# Altium PCB joint_board.PcbDoc
Units mil, origin at the board's own origin, x right, y up, seen from the top; angles counter-clockwise.
Board outline 6000 x 4000 mil, 2 copper layers (Top Layer, Bottom Layer); 57 components, 53 nets, 256 pads, 1 vias.
Unrouted connection lines stored in the file: 166.
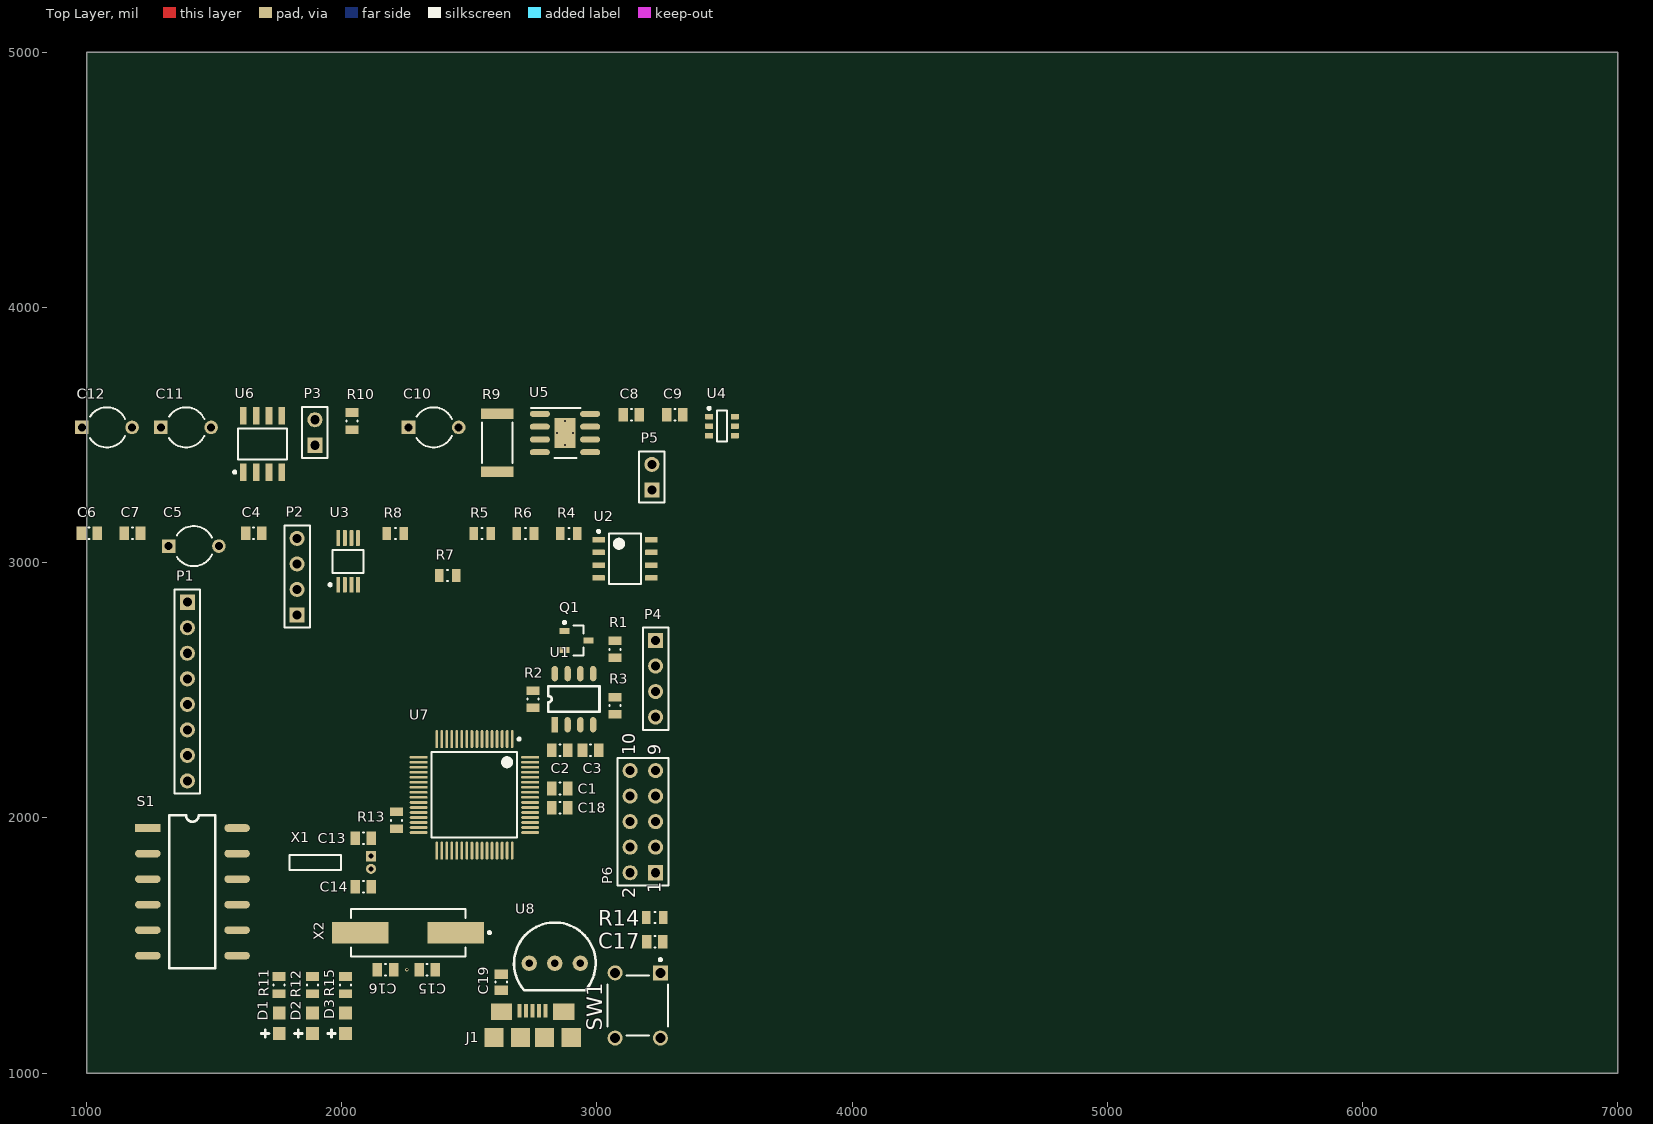
[diagram p0: Top Layer view]
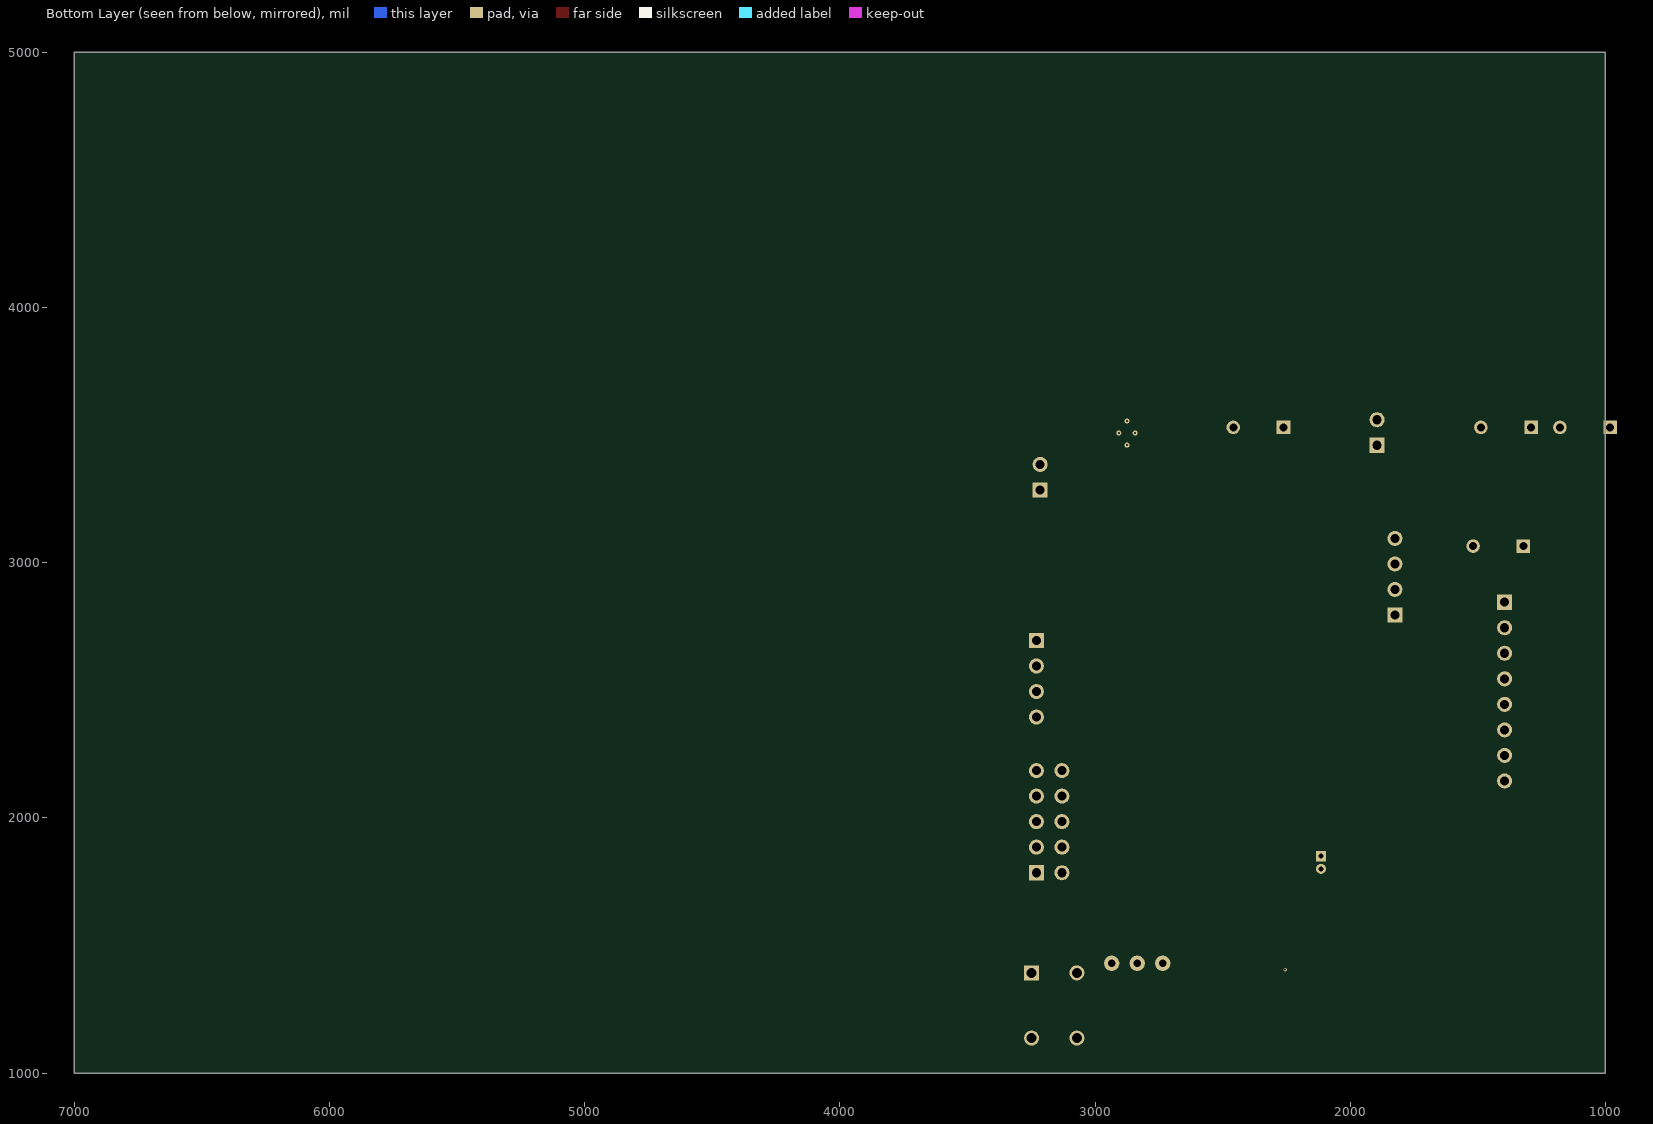
[diagram p1: Bottom Layer view, seen from below]

## Layer stack, top to bottom
Top Solder: solder mask 0.4, Solder Resist, Dk 3.5
Top Layer: signal copper 1.4
Dielectric 1: dielectric 12.6, FR-4, Dk 4.8
Bottom Layer: signal copper 1.4
Bottom Solder: solder mask 0.4, Solder Resist, Dk 3.5

## Board outline
1000,1000 7000,1000 7000,5000 1000,5000

## Design rules (kind name [scope] priority, off if disabled: settings)
Clearance [All] p1: gap=8 ignorepadtopadclearanceinfootprint=FALSE
ComponentClearance [All] p1 off: gap=10 collisioncheckmode=3 verticalgap=10 showdistances=FALSE
PolygonConnect [All] p1: connectstyle=Relief reliefconductorwidth=10 reliefentries=4 polygonreliefangle="90 Angle" airgapwidth=10
RoutingVias [All] p1: holewidth=28 width=50 viastyle="Through Hole" minholewidth=8 minwidth=15 maxholewidth=28 maxwidth=50
SolderMaskExpansion [All] p1: expansion=4
Width [All] p1: maxlimit=100 minlimit=8 preferedwidth=8
29 further rules are at their usual default settings.

## Classes and differential pairs
component class joint_board: C13 C14 C15 C16 C17 C18 C19 D1 D2 D3 J1 P4 P5 P6 R11 R12 R13 R14 R15 SW1 U7 U8 X1 X2
component class joint_board_motor_drivers: C8 C9 C10 C11 C12 P3 R9 R10 U4 U5 U6
component class joint_board_load_cell: C4 C5 C6 C7 P2 R4 R5 R6 R7 R8 U2 U3
component class joint_board_hall_effect_encoder: P1
component class joint_board_can: C1 C2 C3 Q1 R1 R2 R3 S1 U1

## Components (designator, comment, footprint, x,y, rotation, side; value= is the part's Value field where it differs from the comment)
C1 "0.1uF" CAPC0805(2012)145_L 2855,2115 r180 top
C2 "47pF" CAPC0805(2012)145_L 2855,2265 r180 top
C3 "47pF" CAPC0805(2012)145_L 2975,2265 r0 top
C4 "10nF" CAPC0805(2012)145_L 1655,3115 r0 top
C5 "1uF" CAPR5-4X5 1420,3065 r0 top
C6 "10nF" CAPC0805(2012)145_L 1010,3115 r0 top
C7 "10nF" CAPC0805(2012)145_L 1180,3115 r0 top
C8 "10nF" CAPC0805(2012)145_L 3135,3580 r0 top
C9 "10nF" CAPC0805(2012)145_L 3305,3580 r0 top
C10 "100uF" CAPR5-4X5 2360,3530 r0 top
C11 "0.1uF" CAPR5-4X5 1390,3530 r0 top
C12 "0.1uF" CAPR5-4X5 1080,3530 r0 top
C13 "24pF" CAPC0805(2012)145_L 2085,1920 r0 top
C14 "24pF" CAPC0805(2012)145_L 2085,1730 r0 top
C15 "10pF" CAPC0805(2012)145_L 2335,1405 r180 top
C16 "10pF" CAPC0805(2012)145_L 2171.5,1405 r0 top
C17 "1nF" CAPC0805(2012)145_L 3226.93,1515 r0 top
C18 "0.1uF" CAPC0805(2012)145_L 2855,2040 r180 top
C19 "0.1uF" CAPC0805(2012)145_L 2625,1356.5 r90 top
D1 "VM_LED" "0805 Diode" 1755,1195 r90 top
D2 "VCC_LED" "0805 Diode" 1885,1195 r90 top
D3 "HB_LED_LED" "0805 Diode" 2015,1195 r90 top
J1 "10118192-0001LF" 10118192-0001LF_10118192-0001LF(Primary) 2747.76,1082.91 r0 top
P1 "Header 8" HDR1X8 1395,2845 r270 top
P2 "Load Cell" HDR1X4 1825,2795 r90 top
P3 "Header 2" HDR1X2 1895,3460 r90 top
P4 "Header 4" HDR1X4 3230,2695 r270 top
P5 "Header 2" HDR1X2 3215,3285 r90 top
P6 "Header 5X2" HDR2X5 3230,1785 r90 top
Q1 "BS170" SOT23-3 2920,2695 r0 top
R1 "115" RESC0805(2012)_L 3070,2660 r270 top
R2 "1k" RESC0805(2012)_L 2750,2465 r270 top
R3 "100k" RESC0805(2012)_L 3070,2440 r90 top
R4 "5.0k" RESC0805(2012)_L 2890,3115 r0 top
R5 "1k" RESC0805(2012)_L 2550,3115 r0 top
R6 "200k" RESC0805(2012)_L 2720,3115 r0 top
R7 "10k" RESC0805(2012)_L 2415,2950 r0 top
R8 "3.9k" RESC0805(2012)_L 2210,3115 r0 top
R9 "0.1 Shunt Resistor" RESC2512(6432)_L 2610,3470 r90 top
R10 "10k" RESC0805(2012)_L 2040,3555 r90 top
R11 "4k" RESC0805(2012)_L 1755,1345 r270 top
R12 "1k" RESC0805(2012)_L 1885,1345 r270 top
R13 "10k" RESC0805(2012)_L 2215,1990 r270 top
R14 "10k" RESC0805(2012)_L 3226.93,1610 r180 top
R15 "1k" RESC0805(2012)_L 2015,1345 r270 top
S1 "DIP_Switch_6" SOP12 1240,1960 r0 top
SW1 "1825910-6" TECO-1825910-6_V 3160,1265 r270 top
U1 "TCAN332" SOP8 2835,2365 r90 top
U2 "LM358DR" D0008A_L 3110,3015 r0 top
U3 "INA332AIDGKR" DGK0008A_M 2025,3005 r90 top
U4 "SN74LVC1G18DBVR" DBV0006A_L 3490,3535 r0 top
U5 "DRV8872DDAR" DDA0008H_N 2875,3507.76 r0 top value=Value
U6 "ACS722LLCTR-05AB-T" ALEG-LC-8_V 1690,3465 r0 top
U7 "TM4C123GH6PMT7R" PM0064A_N 2520,2090 r270 top value=Value
U8 "LP2950-33LPRE3" LP3 2835,1430 r0 top value=Value
X1 "AB15T-32.768KHZ" ABRA-AB15T-2_V 2115,1825 r0 top
X2 "ABLS2-4.096MHZ-D4Y-T" ABRA-ABLS2-2_V 2260,1550 r180 top

## Footprints (in the part's own frame and the unit in brackets; to place one, negate y for a bottom-side part, rotate by r counter-clockwise, add the part's x,y. Pads: shape width x height; smd on the part's side, far side on the other; paste and mask are expansions set on the pad)
"0805 Diode" [mil]
  rect 50x50 smd: 1(-40,0) 2(40,0)
  silkscreen extent -55,40 -25,70
10118192-0001LF_10118192-0001LF(Primary) [mm]
  rect 0.4x1.35 smd: 1(-1.3,4.1) 2(-0.65,4.1) 3(0,4.1) 4(0.65,4.1) 5(1.3,4.1)
  rect 1.9x1.9 smd: M1(-1.2,1.45) M2(1.2,1.45) S1(-3.85,1.45) S2(3.85,1.45)
  rect 2.1x1.6 smd: S3(-3.1,4) S4(3.1,4)
ABRA-AB15T-2_V [mm] "THD, 2-Leads, Body 5.1x1.5mm, Height 1.5mm"
  rect 1x1 hole 0.5: 1(0,0.627)
  round 1 hole 0.5: 2(0,-0.627)
  silkscreen extent -8.1,-0.75 -3,0.75, body extent -8.1,-0.74 0.1,0.77, height 1.5
ABRA-ABLS2-2_V [mm] "SMD, 2-Leads, Body 11.4x4.7mm, Height 3.3mm"
  rect 5.6x2.1 smd: 1(-4.75,0) 2(4.75,0)
  silkscreen extent -8.23,-2.35 5.7,2.35, body extent -5.7,-2.35 5.7,2.35, height 3.3
ALEG-LC-8_V [mm] "SOIC, 8-Leads, Body 4.9x3.9mm, Pitch 1.27mm"
  rect 0.65x1.75 smd: 1(-1.905,-2.8) 2(-0.635,-2.8) 3(0.635,-2.8) 4(1.905,-2.8) 5(1.905,2.8) 6(0.635,2.8) 7(-0.635,2.8) 8(-1.905,2.8)
  silkscreen extent -2.9,-2.92 2.45,1.53, body extent -2.45,-1.95 2.45,1.95, height 1.75
CAPC0805(2012)145_L [mm]
  rect 0.95x1.35 smd: 1(-0.8,0) 2(0.8,0)
  silkscreen extent -0.05,-0.58 0.05,0.58, body extent -1.1,-0.72 1.1,0.72, height 1.45
CAPR5-4X5 [mm] "Capacitor; 2 Leads"
  rect 1.35x1.35 hole 0.8: 1(-2.5,0)
  round 1.35 hole 0.8: 2(2.5,0)
  silkscreen extent -1.69,-2 1.82,2
D0008A_L [mm] "SOIC, 8-Leads, Body 5x4mm, Pitch 1.27mm, IPC High Density"
  rrect18% 1.25x0.55 smd: 1(-2.625,1.905) 2(-2.625,0.635) 3(-2.625,-0.635) 4(-2.625,-1.905) 5(2.625,-1.905) 6(2.625,-0.635) 7(2.625,0.635) 8(2.625,1.905)
  silkscreen extent -2.75,-2.5 1.6,2.85, body extent -3,-2.45 3,2.45, height 1.63
DBV0006A_L [mm] "SOT23, 6-Leads, Body 3.05x1.75mm, Pitch 0.95mm, IPC High Density"
  rrect18% 0.8x0.55 smd: 1(-1.275,0.95) 2(-1.275,0) 3(-1.275,-0.95) 4(1.275,-0.95) 5(1.275,0) 6(1.275,0.95)
  silkscreen extent -1.4,-1.55 0.5,1.9, body extent -1.42,-1.46 1.42,1.46, height 1.11
DDA0008H_N [mm]
  oval 2x0.6 smd paste+0 mask+0.051: 1(-2.5,1.905) 2(-2.5,0.635) 3(-2.5,-0.635) 4(-2.5,-1.905) 5(2.5,-1.905) 6(2.5,-0.635) 7(2.5,0.635) 8(2.5,1.905)
  rect 2.13x3 smd paste+0 mask+0.051: 9(0,0)
  round 0.5 / inner round 1.524 / far side round 0.5 hole 0.203 mask+0.051: V(-0.815,0) V(0,-1.2) V(0,1.2) V(0.815,0)
  silkscreen extent -3.38,-2.5 1.53,2.51, body extent 0,0 0.25,0.25, height 0.25
DGK0008A_M [mm] "TSOP, 8-Leads, Body 3.1x3.1mm, Pitch 0.65mm, IPC Low Density"
  rrect22% 1.55x0.381 smd: 1(-2.325,0.975) 2(-2.325,0.325) 3(-2.325,-0.325) 4(-2.325,-0.975) 5(2.325,-0.975) 6(2.325,-0.325) 7(2.325,0.325) 8(2.325,0.975)
  silkscreen extent -2.45,-1.55 1.15,1.92, body extent -2.45,-1.5 2.45,1.5, height 0.94
HDR1X2 [mm] "Connector; Header; 2 Position"
  rect 1.5x1.5 hole 0.9: 1(0,0)
  round 1.5 hole 0.9: 2(2.54,0)
  silkscreen extent -1.27,-1.27 3.81,1.27
HDR1X4 [mm] "Connector; Header; 4 Position"
  rect 1.5x1.5 hole 0.9: 1(0,0)
  round 1.5 hole 0.9: 2(2.54,0) 3(5.08,0) 4(7.62,0)
  silkscreen extent -1.27,-1.27 8.89,1.27
HDR1X8 [mm] "Connector; Header; 8 Position"
  rect 1.5x1.5 hole 0.9: 1(0,0)
  round 1.5 hole 0.9: 2(2.54,0) 3(5.08,0) 4(7.62,0) 5(10.16,0) 6(12.7,0) 7(15.24,0) 8(17.78,0)
  silkscreen extent -1.27,-1.27 19.05,1.27
HDR2X5 [mm] "Connector; Header; 5x2 Position"
  rect 1.5x1.5 hole 0.9: 1(0,0)
  round 1.5 hole 0.9: 2(0,2.54) 3(2.54,0) 4(2.54,2.54) 5(5.08,0) 6(5.08,2.54) 7(7.62,0) 8(7.62,2.54) 9(10.16,0) 10(10.16,2.54)
  silkscreen extent -1.27,-1.27 11.43,3.81
LP3 [mil]
  round 60 hole 30: 1(100,0) 2(0,0) 3(-100,0)
  silkscreen extent -160,-105 160,160
PM0064A_N [mm]
  oval 1.8x0.267 smd paste-0.102 mask+0.051: 1(-5.55,3.75) 2(-5.55,3.25) 3(-5.55,2.75) 4(-5.55,2.25) 5(-5.55,1.75) 6(-5.55,1.25) 7(-5.55,0.75) 8(-5.55,0.25) 9(-5.55,-0.25) 10(-5.55,-0.75) 11(-5.55,-1.25) 12(-5.55,-1.75) 13(-5.55,-2.25) 14(-5.55,-2.75) 15(-5.55,-3.25) 16(-5.55,-3.75) 33(5.55,-3.75) 34(5.55,-3.25) 35(5.55,-2.75) 36(5.55,-2.25) 37(5.55,-1.75) 38(5.55,-1.25) 39(5.55,-0.75) 40(5.55,-0.25) 41(5.55,0.25) 42(5.55,0.75) 43(5.55,1.25) 44(5.55,1.75) 45(5.55,2.25) 46(5.55,2.75) 47(5.55,3.25) 48(5.55,3.75)
  oval 0.267x1.8 smd paste-0.102 mask+0.051: 17(-3.75,-5.55) 18(-3.25,-5.55) 19(-2.75,-5.55) 20(-2.25,-5.55) 21(-1.75,-5.55) 22(-1.25,-5.55) 23(-0.75,-5.55) 24(-0.25,-5.55) 25(0.25,-5.55) 26(0.75,-5.55) 27(1.25,-5.55) 28(1.75,-5.55) 29(2.25,-5.55) 30(2.75,-5.55) 31(3.25,-5.55) 32(3.75,-5.55) 49(3.75,5.55) 50(3.25,5.55) 51(2.75,5.55) 52(2.25,5.55) 53(1.75,5.55) 54(1.25,5.55) 55(0.75,5.55) 56(0.25,5.55) 57(-0.25,5.55) 58(-0.75,5.55) 59(-1.25,5.55) 60(-1.75,5.55) 61(-2.25,5.55) 62(-2.75,5.55) 63(-3.25,5.55) 64(-3.75,5.55)
  silkscreen extent -5.67,-4.25 4.25,4.58, body extent 0,0 0.25,0.25, height 0.25
RESC0805(2012)_L [mm]
  rect 0.85x1.3 smd: 1(-0.85,0) 2(0.85,0)
  silkscreen extent -0.05,-0.55 0.05,0.55, body extent -1.1,-0.67 1.1,0.68, height 0.7
RESC2512(6432)_L [mm]
  rect 1.05x3.25 smd: 1(-2.9,0) 2(2.9,0)
  silkscreen extent -2,-1.52 2,1.53, body extent -3.25,-1.7 3.25,1.7, height 0.75
SOP8 [mil]
  rect 60x25 smd: 1(0,0)
  oval 60x25 smd: 2(0,-50) 3(0,-100) 4(0,-150) 5(200,-150) 6(200,-100) 7(200,-50) 8(200,0)
  silkscreen extent 50,-175 150,25
SOP12 [mil]
  rect 100x30 smd: 1(0,0)
  oval 100x30 smd: 2(0,-100) 3(0,-200) 4(0,-300) 5(0,-400) 6(0,-500) 7(350,-500) 8(350,-400) 9(350,-300) 10(350,-200) 11(350,-100) 12(350,0)
  silkscreen extent 85,-550 265,50
SOT23-3 [mm] "SOT23, 3-Leads, Body 2.90x2.45mm, Pitch 0.95mm, IPC Medium Density"
  rect 1x0.6 smd: 1(-1.2,0.95) 2(-1.2,-0.95) 3(1.2,0)
  silkscreen extent -1.32,-1.5 0.7,1.92, body extent -0.7,-1.5 0.7,1.5, height 1.1
TECO-1825910-6_V [mm] "Switch, 4-Leads, Body 5.99x5.99mm"
  rect 1.5x1.5 hole 0.99: 1(-3.25,2.25)
  round 1.5 hole 0.99: 2(3.25,2.25) 3(-3.25,-2.25) 4(3.25,-2.25)
  silkscreen extent -4.67,-2.99 2.99,3, body extent -3,-2.99 2.99,3, height 5

## Part data
C1 C2 C3 C4 C6 C7 C8 C9 C13 C14 C15 C16 C17 C18 C19: library part CMP-1590-00003-1, "0805 (2012 Metric) Chip Capacitor", Case-EIA=0805, Case-Metric=2012, PackageReference=CAPC0805(2012)145
C5 C11 C12: library part Cap2, "Capacitor", PackageDescription="Capacitor; 2 Leads", PackageReference=CAPR5-4X5, Published=23-Sep-2002, Publisher="Altium Limited"
C10: library part Cap2, "100uF Filter Capacitor", PackageDescription="Capacitor; 2 Leads", PackageReference=CAPR5-4X5, Published=23-Sep-2002, Publisher="Altium Limited"
D1 D2 D3: library part SMD_LED
J1: "CONN USB MICRO B RECPT SMT R/A", Package=None, Availability=Good, MF=Amphenol, MP=10118192-0001LF, Price="0.22 USD"
P1: "Header, 8-Pin", LatestRevisionDate=17-Jul-2002, LatestRevisionNote="Re-released for DXP Platform.", Publisher="Altium Limited"
P2: library part "Header 4", "Header, 4-Pin", LatestRevisionDate=17-Jul-2002, LatestRevisionNote="Re-released for DXP Platform.", Publisher="Altium Limited"
P3 P5: "Header, 2-Pin", LatestRevisionDate=17-Jul-2002, LatestRevisionNote="Re-released for DXP Platform.", Publisher="Altium Limited"
P4: "Header, 4-Pin", LatestRevisionDate=17-Jul-2002, LatestRevisionNote="Re-released for DXP Platform.", Publisher="Altium Limited"
P6: "Header, 5-Pin, Dual row", LatestRevisionDate=17-Jul-2002, LatestRevisionNote="Re-released for DXP Platform.", Publisher="Altium Limited"
Q1: "Small Signal MOSFET, 500 mA, 60 V, N-Channel, 3-Pin TO-92, Bulk Box", Manufacturer="On Semiconductor", Package Type=TO-92, Supplier Part Number 1=BS170OS-ND, Channel Polarity="N Channel", ComponentLink1Description="Manufacturer URL", ComponentLink1URL=http://www.onsemi.com/, ComponentLink2Description=Datasheet, ComponentLink2URL=http://www.onsemi.com/pub_link/Collateral/BS170-D.PDF, ComponentLink3Description="Package Specification", ComponentLink3URL=http://www.onsemi.cn/pub_link/Collateral/2N6426-D.PDF, Configuration=Single, DatasheetVersion="Rev. 6", ID Max (A)=0.5, Mounting Technology="Through Hole", PackageDescription="3-Pin Transistor Outline, Body 4.825 x 3.685 mm, Pitch 1.27 mm", PackageReference=TO-92-3-29-11_AM_SL, PackageVersion="Rev. AM", Packing="Bulk Box", PartNumber=BS170, PD Max (W)=0.35, Supplier 1=Digi-Key, V(BR)DSS Min (V)=60, VGS(th) Max (V)=3, VGS Max (V)=20
R1 R2 R3 R4 R5 R6 R7 R8 R10 R11 R12 R13 R14 R15: library part CMP-1591-00002-1, "0805 (2012 Metric) Chip Resistor", Case-EIA=0805, Case-Metric=2012, PackageReference=RESC0805(2012)
R9: library part CMP-1591-00007-1, "2512 (6432 Metric) Chip Resistor", Case-EIA=2512, Case-Metric=6432, PackageReference=RESC2512(6432)
S1: "6 pin DIP switch"
SW1: library part CMP-1684-00021-1, "Tact Switch, SPST-NO, 0.05 A, -35 to 85 degC, 4-Pin THD, RoHS, Bulk", Actuator Color=Black, Contact Rating @ Voltage=0.05A@24VDC, Dielectric Strength=500VAC, Manufacturer="TE Connectivity", Maximum AC Voltage Rating=N/A, Maximum Contact Resistance=100mOhm, Maximum DC Voltage Rating=24V, Minimum Insulation Resistance=100MOhm, Operating Temperature=-35to85C, Package Description="4-Pin Through Hole Device, Body 5.99 x 5.99 mm, Pitch 6.5 mm", Package Reference=THD, Actuator Length=1.4mm, Actuator Material=PolybutyleneTerephthalate, Actuator Style=RoundButton, Base Material=N/A, Body Orientation=Straight, Bushing Type=Unthreaded, Contact Material=CopperAlloy, Contact Plating=Silver, Datasheet URL=http://www.te.com/commerce/DocumentDelivery/DDEController?Action=showdoc&DocId=Customer+Drawing%7F1825910%7FC9%7Fpdf%7FEnglish%7FENG_CD_1825910_C9.pdf%7F1825910-6, Datasheet Version="Rev. C9", Dimension=5.99x5mm, Electrical Life=100000Cycles, Family=1825910, Function=MomentaryContact, Housing Material=N/A, Illumination=N/R, Manufacturer URL=http://www.te.com, Mechanical Life=100000Cycles, Mounting=ThroughHole, Packaging=N/A, Part No=1825910-6, Pole Throw Configuration=SPST, Product Weight=N/A, RoHS=Yes, Seal Description=N/A, Seal Location=N/A, Switch Configuration=OFF(ON), Terminal Type=PCPins, Thread Size=N/R
U1: "3.3V CAN Transceiver"
U2: library part CMP-1685-00009-1, "Dual Operational Amplifier, 3 to 32 V, 0 to 70 degC, 8-Pin SOIC (D), Green (RoHS & no Sb/Br), Tape and Reel", Code_JEDEC=MS-012, ComponentLink1Description="Manufacturer URL", ComponentLink1URL=http://www.ti.com/, ComponentLink2Description=Datasheet, ComponentLink2URL=http://www.ti.com/lit/ds/symlink/lm358.pdf, ComponentLink3Description="Package Specification", ComponentLink3URL=http://www.ti.com/lit/ml/msoi002j/msoi002j.pdf, DatasheetVersion="SLOS068T, 04/2015", PackageDescription="8-Pin Small Outline Integrated Circuit, Body 4.9 x 3.9 mm, Pitch 1.27 mm", PackageReference=D0008A, PackageVersion="4040047-3/M, 06/2011"
U3: library part CMP-0944-00077-2, "Low-Power, Single Supply, CMOS, Low Cost, Instrumentation Amplifier, -55 to 125 degC, 8-pin SOP (DGK8), Green (RoHS & no Sb/Br)", Input Bias Current (+/-)(Max)(nA)=0.01, Manufacturer="Texas Instruments", Quiescent Current (+/-)(Typ)(mA)=0.415, CMRR(Min)(dB)=60, Code_JEDEC=MO-187, ComponentLink1Description="Manufacturer URL", ComponentLink1URL=http://www.ti.com/, ComponentLink2Description=Datasheet, ComponentLink2URL=http://www.ti.com/general/docs/lit/getliterature.tsp?genericPartNumber=INA332&fileType=pdf, ComponentLink3Description="Package Specification", ComponentLink3URL=http://www.ti.com/litv/pdf/mpds028d, DatasheetVersion=SBOS216B, Eco-Plan="Green (RoHS & no Sb/Br)", Gain(V/V)="5 to 1000", Input Offset (+/-)(Max)(uV)=8000, Mounting Technology="Surface Mount", Noise at 1kHz(Typ)(nV/rt(Hz))=46, Non-Linearity (+/-)(Max)(%)=0.01, Number of Channels=1, PackageDescription="8-Pin Thin Small Outline, Body 3 x 3 mm, Pitch 0.65 mm", PackageReference=DGK0008A, PackageVersion="4073329/E, 05/2006", PartNumber=INA332AIDGKR, SubFamily="Single Supply", Vs(Max)(V)=5.5, Vs(Min)(V)=2.5
U4: library part CMP-0859-00184-3, "One of Two Noninverting Demultiplexer with 3-State Deselected Output, DBV0006A, LARGE T&R", F @ Nom Voltage(Max)(Mhz)=150, Generic Part Number=SN74LVC1G18, ICC @ Nom Voltage(Max)(mA)=0.01, Manufacturer="Texas Instruments", Operating Temperature Range(C)="-40 to 85", Rating=Catalog, tpd @ Nom Voltage(Max)(ns)=9.3,5,4.2,3.2, Voltage(Nom)(V)=1.8,2.5,3.3,5, 3-State Output=No, Bits(#)=1, DatasheetVersion=SCES406K, Input Type=CMOS/TTL, Logic=True, Output Drive (IOL/IOH)(Max)(mA)=32/-32, Output Type=CMOS, PackageReference=DBV0006A, Schmitt Trigger=No, Specialty Logic Family=Decoder/Encoder/Multiplexer, Sub-Family=Decoder/Encoder/Multiplexer, Technology Family=LVC, VCC(Max)(V)=5.5, VCC(Min)(V)=1.65
U5: "Imported", Alternate_PartNumber=DRV8872DDA, Manufacturer="Texas Instruments", CompType=IC, MountType=SMT, PackageReference=DDA0008H, PartNumber=DRV8872DDAR, PIN_COUNT=9, RefDes=RefDes, TYPE=TYPE
U6: library part CMP-1557-00006-1, "High Accuracy, Galvanically Isolated Current Sensor IC, 3 to 3.6 V, -5 to 5 A IP, -40 to 150 degC, 8-Pin SOIC (LC), RoHS, Tape and Reel", Temperature Max="150 degC", Temperature Min="-40 degC", ComponentLink1Description="Manufacturer URL", ComponentLink1URL=http://www.allegromicro.com/, ComponentLink2Description=Datasheet, ComponentLink2URL=http://www.allegromicro.com/~/media/Files/Datasheets/ACS722-Datasheet.ashx?la=en, ComponentLink3Description="Package Specification", ComponentLink3URL=http://www.allegromicro.com/~/media/Files/Datasheets/ACS711-Datasheet.ashx?la=en, IP Max="5 A", IP Min="-5 A", Mounting Technology="Surface Mount", PackageDescription="8-Pin Small Outline Integrated Package, Body 4.9 x 3.9 mm, Pitch 1.27 mm", Packing="Tape and Reel", PartNumber=ACS722LLCTR-05AB-T, RoHS=TRUE, VCC Max="3.6 V", VCC Min="3 V"
U7: "Imported", Alternate_PartNumber=TM4C123GH6PMT, Manufacturer="Texas Instruments", PartNumber=TM4C123GH6PMTR, CompType=IC, MountType=SMT, PackageReference=PM0064A, PIN_COUNT=64, RefDes=RefDes, RoHS=Y, TYPE=TYPE
U8: "Imported", Manufacturer="Texas Instruments", Built_By=EMA_UL_Team, C="Copyright (C) 2015 Accelerated Designs. All rights reserved", Manufacturer_Part_Number=LP2950-33LPRE3, RefDes=RefDes, TYPE=Type, Vendor="Texas Instruments"
X1: library part CMP-1326-00001-1, "Low Frequency Cylindrical Watch Crystal, 32.768 kHz, -20 to 70 degC, 2-Pin 5 x 1.4 x 1.5 mm THD, RoHS, Bulk", Frequency="32.768 kHz", Load Capacitance CL="12.5 pF", Manufacturer=Abracon, Shunt Capacitance C0="1 pF Typ.", Temperature Range="-20 to 70 degC", ComponentLink1Description="Manufacturer URL", ComponentLink1URL=http://www.abracon.com/, ComponentLink2Description=Datasheet, ComponentLink2URL=http://www.abracon.com/Resonators/AB15T.pdf, ComponentLink3Description="Package Specification", ComponentLink3URL=http://www.abracon.com/Resonators/AB15T.pdf, DatasheetVersion=Jun-10, ESR="40 KOhm Max.", Mounting Technology="Through Hole", PackageDescription="2-Pin THD, Body 5 x 1.4 mm, Pin Spacing 0.45 mm", Packing=Bulk, PartNumber=AB15T-32.768KHZ, RoHS=TRUE
X2: library part CMP-0277-00002-1, "Low Profile Surface Mount Microprocessor Crystal, 4.096 MHz +/-30 ppm, 180 Ohm, -40 to 85 degC, 2-Pin 11.4 x 4.7 x 3.3 mm SMD, RoHS, Tape and Reel", Freq. Stability="+/- 30 ppm", Frequency="4.096 MHz", Load Capacitance="18 pF", Manufacturer=Abracon, Operating Temp. Range="-40 to 85 degC", Shunt Capacitance="7 pF Max.", ComponentLink1Description="Manufacturer URL", ComponentLink1URL=http://www.abracon.com/, ComponentLink2Description=Datasheet, ComponentLink2URL=http://www.abracon.com/Resonators/ABLS2.pdf, DatasheetVersion="Rev. 03.31.11", ESR="180 Ohm", Freq. Tolerance="+/- 30 ppm", Mounting Technology="Surface Mount", Operation Mode="Fundamental or 3rd Overtone", PackageDescription="2-Pin SMD, Body 11.4 x 4.7 mm, Height 3.3 mm", PackageReference=ABLS2-2, Packing="Tape and Reel", PartNumber=ABLS2-4.096MHZ-D4Y-T, RoHS=TRUE

## Via types
v1: diameter 15, hole 8, Top Layer to Bottom Layer, 1 vias

## Nets (pads, with @x,y where several pads share a name; then routed paths per layer and width w, separated by ;. In a path a pad name is that pad's centre, name@x,y a point inside that pad or via, vN(x,y) a via of type N, cw(c..) or ccw(c..) an arc to the next point about the centre after c; other vN are vias at no path point)
+5: C19.2 J1.1 U8.3
+12: C10.1 D1.1 P5.1 U5.5
CANH: P4.2 R1.2 U1.7
CANL: P4.3 Q1.2 R3.2 U1.6
CS: P1.8 U7.20
GND: C1.1 C2.1 C3.1 C4.1 C5.2 C6.1 C7.1 C8.1 C9.1 C10.2 C11.2 C12.2 C15.2 C16.2 C17.1 C18.1 C19.1 J1.5 J1.M1 J1.M2 J1.S1 J1.S2 J1.S3 J1.S4 P1.3 P2.3 P5.2 P6.3 P6.5 P6.9 R3.1 R8.1 R9.1 R11.1 R12.1 R15.1 SW1.2 U1.3 U2.4 U3.4 U4.2 U5.1 U5.9 U5.V U6.5 U6.6 U7.3 U7.12 U7.27 U7.39 U7.55 U8.2
  other v1: 2255,1405
GNDX: C13.2 C14.2 U7.35
IN1: U4.4 U5.3
IN2: U4.6 U5.2
ISEN: C11.1 U6.7 U7.9
LOAD_CELL: C4.2 R6.2 U3.6 U7.7
MISO: P1.6 U7.21
MOTOR_DIR: C8.2 U4.1 U7.4
MOTOR_PWM: C9.2 U4.3 U7.1
NetC6_2: C6.2 P2.2 U3.3
NetC7_2: C7.2 P2.4 U3.2
NetC13_1: C13.1 U7.34 X1.1
NetC14_1: C14.1 U7.36 X1.2
NetC15_1: C15.1 U7.41 X2.1
NetC16_1: C16.1 U7.40 X2.2
NetD1_2: D1.2 R11.2
NetD2_2: D2.2 R12.2
NetD3_1: D3.1 U7.57
NetD3_2: D3.2 R15.2
NetP3_1: P3.1 U5.8
NetP3_2: P3.2 U6.1 U6.2
NetQ1_1: Q1.3 R1.1
NetR4_1: R4.1 R8.2 U2.3
NetR5_1: R5.1 U2.1 U2.2 U3.5
NetR5_2: R5.2 R6.1 U3.1
NetR7_2: R7.2 U3.8
NetR9_2: R9.2 U5.7
NetR10_2: R10.2 U5.4
OUT1: U5.6 U6.3 U6.4
PC0: P6.4 U7.52
PC1: P6.2 U7.51
PC2: P6.8 U7.50
PC3: P6.6 U7.49
RES_EN: P4.4 Q1.1 R2.1
RST: C17.2 P6.10 R14.1 SW1.1 U7.38
RXD: C3.2 U1.4 U7.59
SCLK: P1.7 U7.19
SW1: S1.12 U7.24
SW2: S1.11 U7.23
SW3: S1.10 U7.62
SW4: S1.9 U7.58
SW5: S1.8 U7.64
SW6: S1.7 U7.63
TXD: C2.2 U1.1 U7.60
USB1D+: J1.3 U7.43
USB1D-: J1.2 U7.44
VCC: C1.2 C5.1 C12.1 C18.2 D2.1 P1.1 P1.2 P1.5 P2.1 P4.1 P6.1 R2.2 R4.2 R7.1 R10.1 R13.1 R14.2 S1.1 S1.2 S1.3 S1.4 S1.5 S1.6 U1.2 U2.8 U3.7 U4.5 U6.8 U7.2 U7.11 U7.26 U7.37 U7.42 U7.54 U8.1
WAKE: R13.2 U7.32
pads on no net: J1.4 P1.4 P6.7 SW1.3 SW1.4 U1.5 U1.8 U2.5 U2.6 U2.7 U7.5 U7.6 U7.8 U7.10 U7.13 U7.14 U7.15 U7.16 U7.17 U7.18 U7.22 U7.25 U7.28 U7.29 U7.30 U7.31 U7.33 U7.45 U7.46 U7.47 U7.48 U7.53 U7.56 U7.61

## Text inside footprints (layer, text, board x,y; h text height)
P6: Top Overlay "10" at 3150,2245 h50 r90; Top Overlay "9" at 3250,2245 h50 r90; Top Overlay "1" at 3250,1705 h50 r90; Top Overlay "2" at 3150,1685 h50 r90